# Altium PCB bridge6.PcbDoc
Units mm, origin at the board's own origin, x right, y up, seen from the top; angles counter-clockwise.
Board outline 14.8 x 31.5 mm, 4 copper layers (Top Layer, Internal Plane 1, Internal Plane 2, Bottom Layer), stack 0.758 mm thick; 13 components, 64 nets, 33 pads, 60 vias.
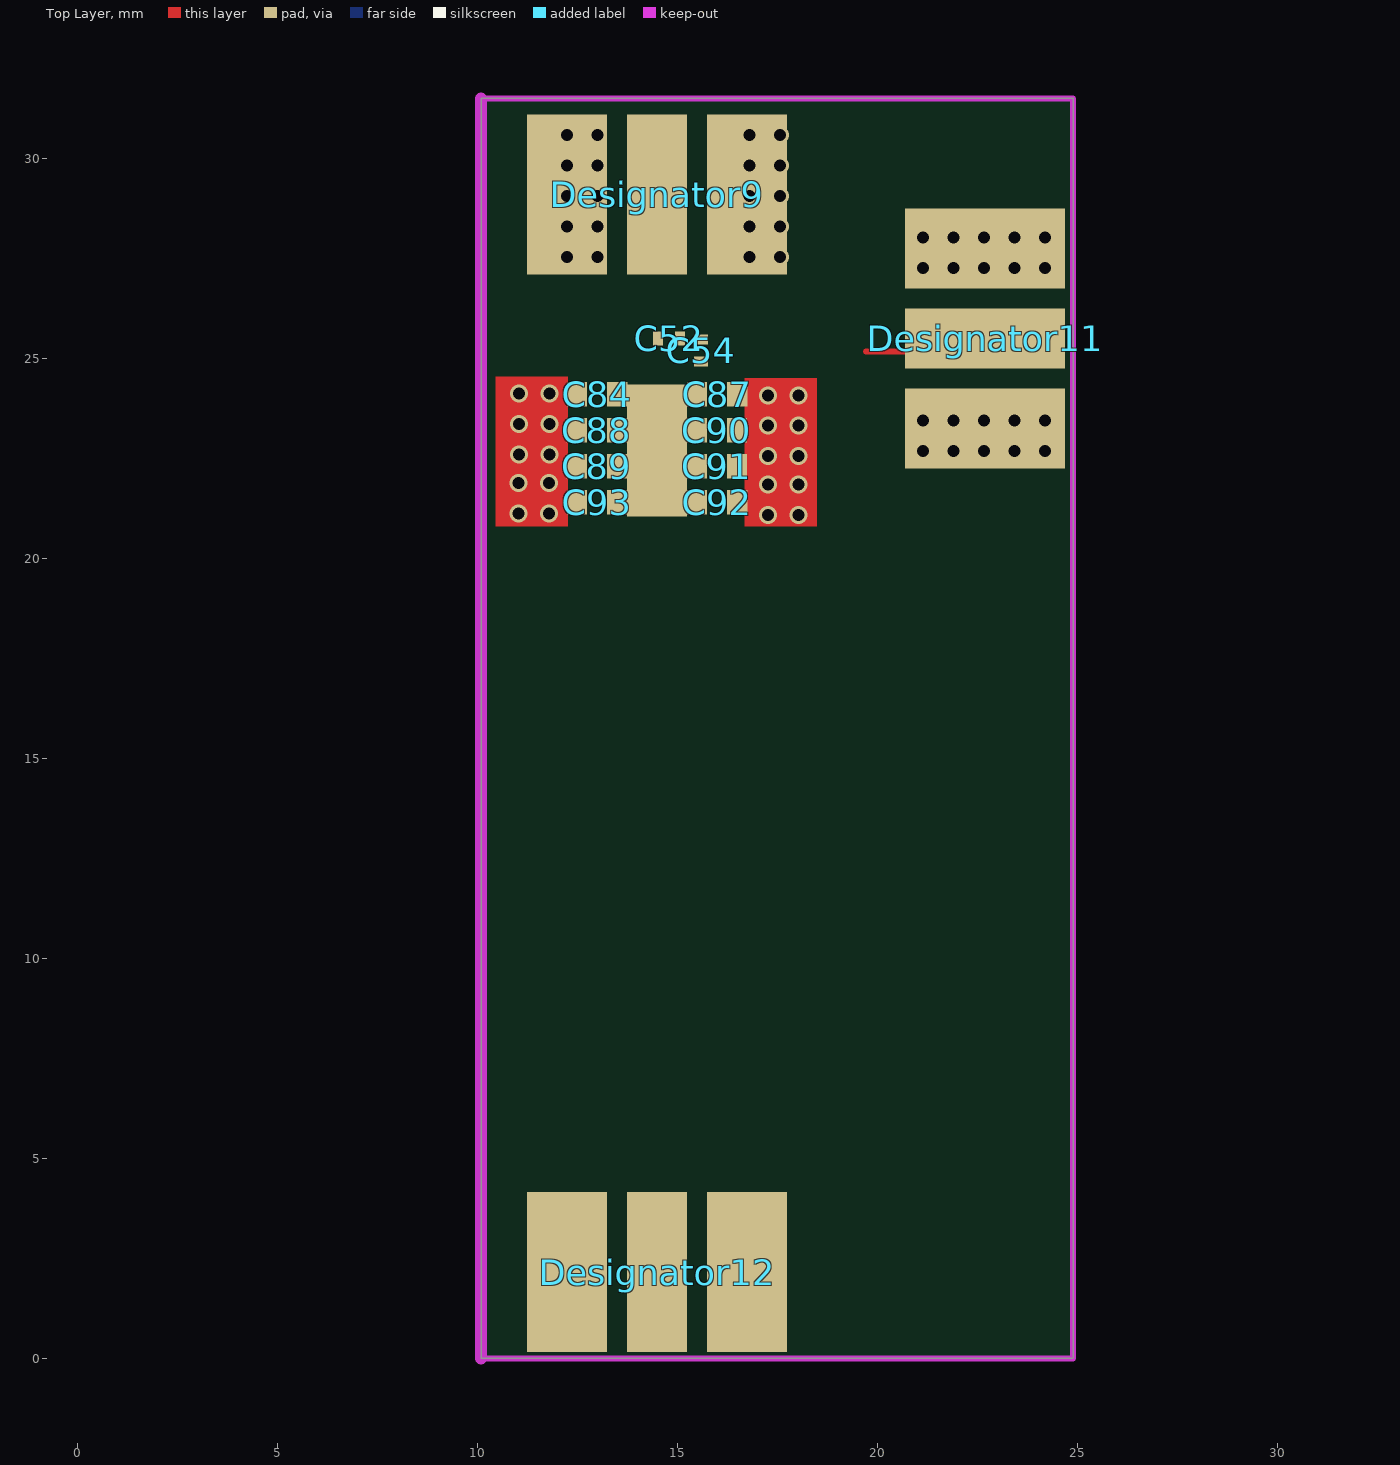
[diagram p0: Top Layer view]
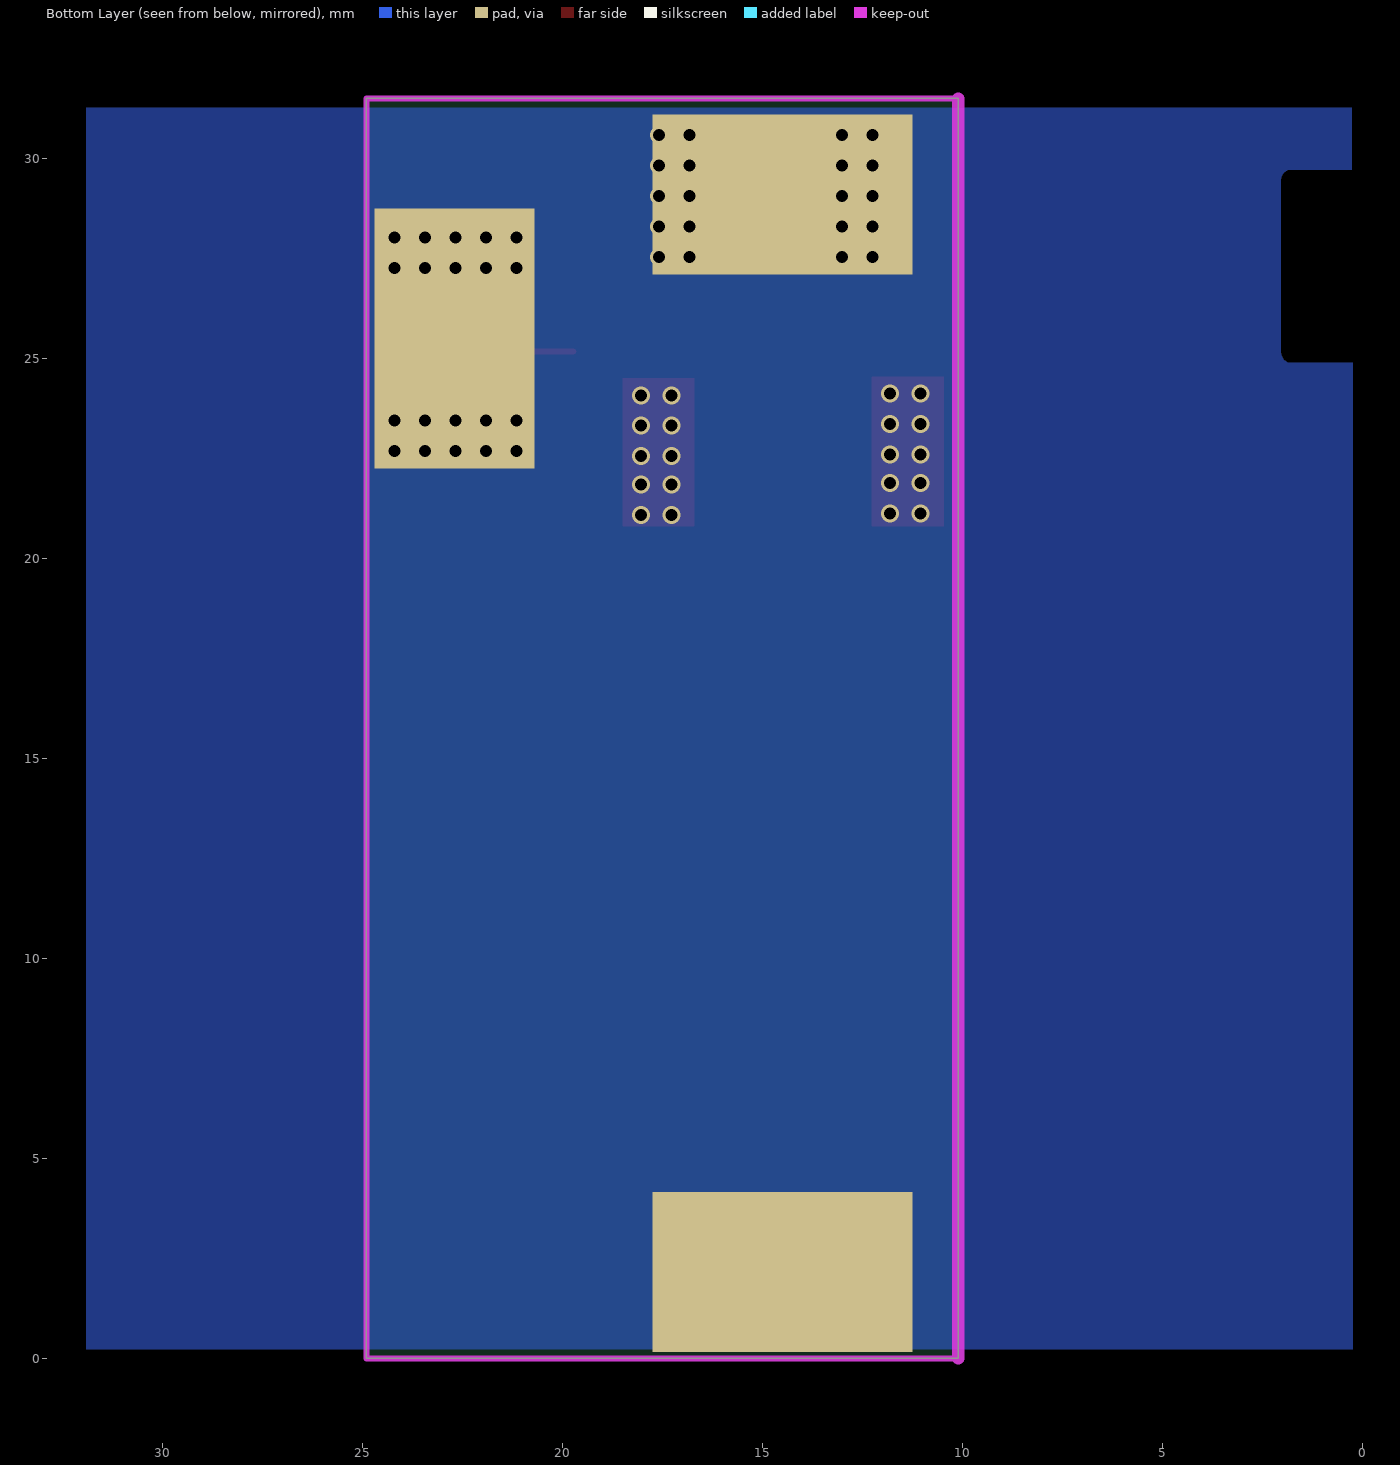
[diagram p1: Bottom Layer view, seen from below]
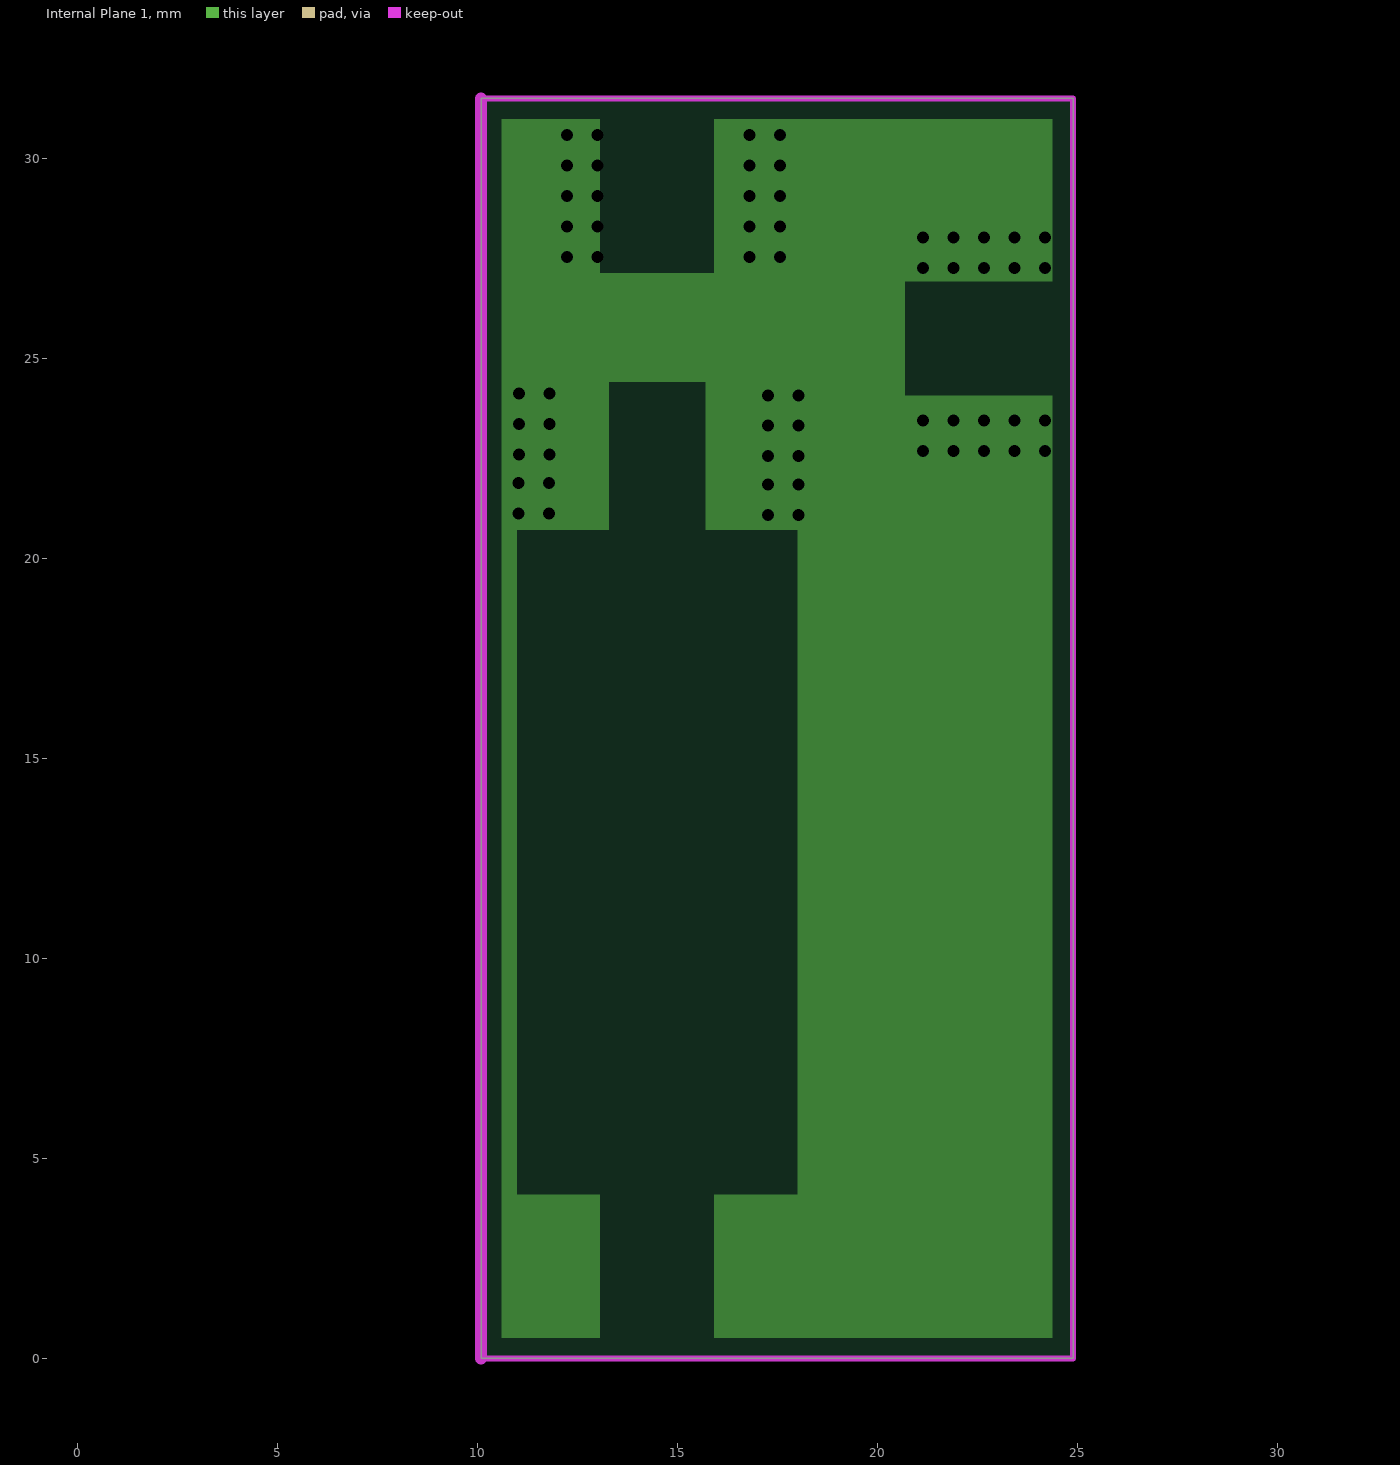
[diagram p2: Internal Plane 1, clearances drawn from the general rule]
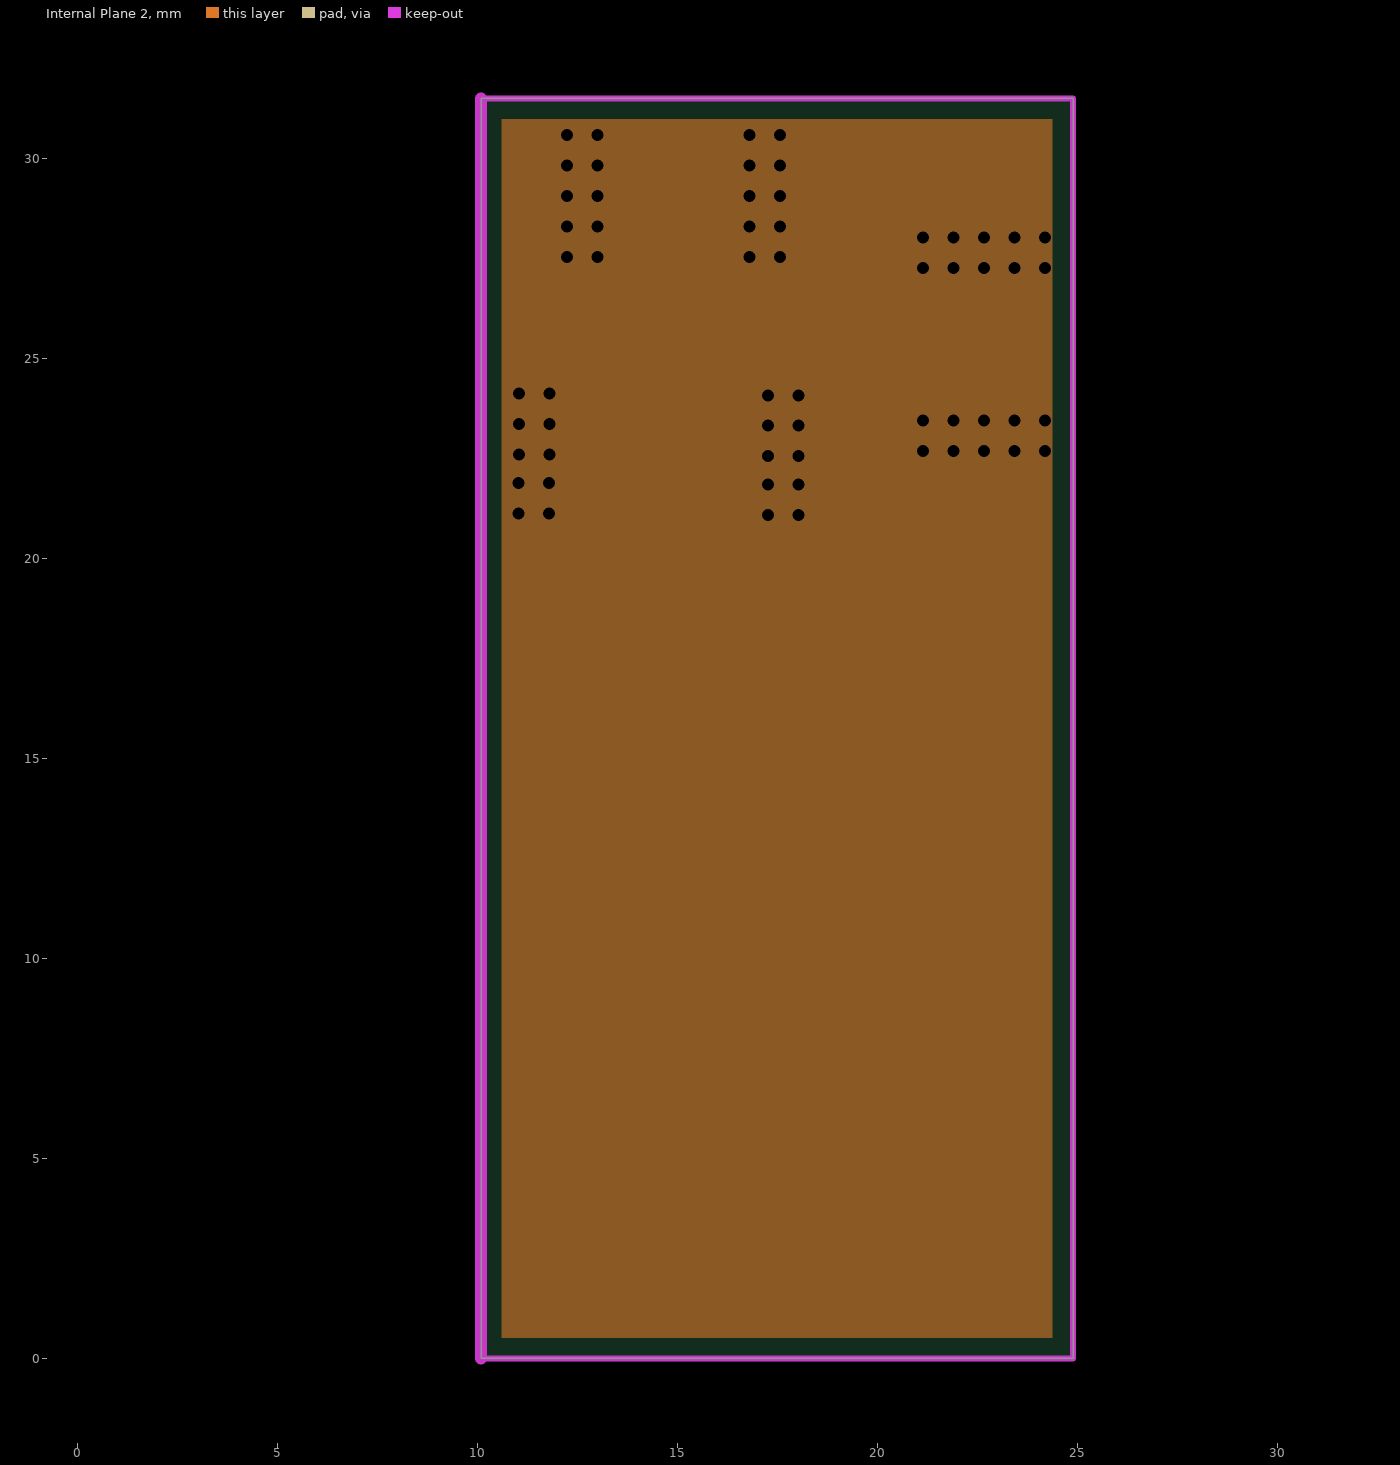
[diagram p3: Internal Plane 2, clearances drawn from the general rule]

## Layer stack, top to bottom
Top Solder: solder mask 0.0102, Solder Resist, Dk 3.8
Top Layer: signal copper 0.0356
Dielectric 1: prepreg 0.1803, Dk 4.6
Internal Plane 1: plane copper 0.036, net GND
Dielectric 3: core 0.254, Dk 4.6
Internal Plane 2: plane copper 0.036, net GND
Dielectric 4: prepreg 0.1803, Dk 4.6
Bottom Layer: signal copper 0.0356
Bottom Solder: solder mask 0.0102, Solder Resist, Dk 3.8

## Board outline
10.1,0 10.1,31.497 24.9,31.497 24.9,0

## Design rules (kind name [scope] priority, off if disabled: settings)
Clearance [All] p1: gap=0.152 ignorepadtopadclearanceinfootprint=FALSE except(0: Arc-Hole Track-Hole SMDPad-Hole THPad-Hole Via-Hole Fill-Hole Poly-Hole Region-Hole Text-Hole)
DiffPairsRouting [All] p1: maxlimit=0.254 minlimit=0.254 mostfreqgap=0.254 toplayer_minwidth=0.152 toplayer_maxwidth=0.381 toplayer_prefwidth=0.381 bottomlayer_minwidth=0.152 bottomlayer_maxwidth=0.381 bottomlayer_prefwidth=0.381 maxuncoupledlength=12.7
MinimumSolderMaskSliver [All] p1 off: minsoldermaskwidth=0.254
PlaneClearance [All] p1: clearance=0.254
PlaneConnect [All] p1: planeconnectstyle=Direct reliefexpansion=0.508 reliefentries=4 reliefconductorwidth=0.254 reliefairgap=0.254
PolygonConnect [All] p1: connectstyle=Direct reliefconductorwidth=0.254 reliefentries=4 polygonreliefangle="90 Angle" airgapwidth=0.254
RoomDefinition mixer [InComponentClass('mixer')] p1 off: confinementstyle=ConfineIn formatcopy=TRUE lockcomponents=FALSE outline 50.026,42.539 188.939,42.539 188.939,52.572 50.026,52.572
RoomDefinition power [InComponentClass('power')] p2 off: confinementstyle=ConfineIn formatcopy=TRUE lockcomponents=FALSE outline 49.924,0.706 109.487,0.706 109.487,6.802 49.924,6.802
RoutingVias [All] p1: holewidth=0.305 width=0.508 viastyle="Through Hole" minholewidth=0.3 minwidth=0.5 maxholewidth=0.711 maxwidth=1.27
SilkToBoardRegionClearance [All] p1 off:
SilkToSilkClearance [All] p1 off: silktosilkclearance=0.254
SilkToSolderMaskClearance [IsPad] p1 off: minsilkscreentomaskgap=0.254 clearancetoexposedcopper=TRUE
SolderMaskExpansion [All] p1: expansion=0.102
Width [All] p1: maxlimit=1.524 minlimit=0.152 preferedwidth=0.152
23 further rules are at their usual default settings.

## Classes and differential pairs
component class mixer: R28
differential pair IF2: +IF2_P -IF2_N
differential pair IF1: +IF1_P -IF1_N

## Components (designator, comment, footprint, x,y, rotation, side; value= is the part's Value field where it differs from the comment)
C52 "0.1uF" 0201 14.8,25.5 r0 top (schematic designator C51)
C54 "0.1uF" 0201 15.6,25.2 r90 top (schematic designator C51)
C84 "0.1uF" 0402 13,24.1 r0 top (schematic designator C80)
C87 "0.1uF" 0402 16,24.1 r0 top (schematic designator C80)
C88 "0.1uF" 0402 12.992,23.2 r0 top (schematic designator C80)
C89 "0.1uF" 0402 12.992,22.3 r0 top (schematic designator C80)
C90 "0.1uF" 0402 15.992,23.2 r0 top (schematic designator C80)
C91 "0.1uF" 0402 15.992,22.3 r0 top (schematic designator C80)
C92 "0.1uF" 0402 16,21.4 r0 top (schematic designator C80)
C93 "0.1uF" 0402 13,21.4 r0 top (schematic designator C80)
Designator9 "Comment" SMA-1.5mm 14.5,29.1 r0 top
Designator11 "Comment" SMA-1.5mm 22.7,25.5 r90 top
Designator12 "Comment" SMA-1.5mm 14.5,2.155 r0 top

## Footprints (in the part's own frame and the unit in brackets; to place one, negate y for a bottom-side part, rotate by r counter-clockwise, add the part's x,y. Pads: shape width x height; smd on the part's side, far side on the other; paste and mask are expansions set on the pad)
0201 [mm]
  rect 0.25x0.35 smd: 1(-0.275,0) 2(0.275,0)
  body extent -0.3,-0.15 0.3,0.15, height 0.23
0402 [mil] "0402-RES"
  rect 20x24 smd: 1(-19.68,0) 2(20,0)
SMA-1.5mm [mm]
  rect 1.5x4 smd: 1(0,0)
  rect 2x4 smd: GND(-2.25,0) GND(2.25,0)
  rect 6.5x4 smd far side: GND(0,0)
  Top Layer pour cut-out: -1.25,2 1.25,2 1.25,-1.975 -1.25,-1.975
  Internal Plane 1 region: 1.42,-1.962 1.42,2 -1.425,2 -1.425,-1.962

## Part data
C52 C54 C84 C87 C88 C89 C90 C91 C92 C93: library part CAP0402-CAP, "<b>Capacitor</b> / Standard 0603 ceramic capacitor, and 0.1\" leaded capacitor.", PARTNO=CC0402ZRY5V7BB104

## Free pads (board coordinates)
  rect 1.5x3.3 smd: 6(14.5,22.7)

## Via types
v1: diameter 0.45, hole 0.3, Top Layer to Bottom Layer, 60 vias

## Nets (pads, with @x,y where several pads share a name; then routed paths per layer and width w, separated by ;. In a path a pad name is that pad's centre, name@x,y a point inside that pad or via, vN(x,y) a via of type N, cw(c..) or ccw(c..) an arc to the next point about the centre after c; other vN are vias at no path point)
5V: 
5V-MIXER: Designator11.1 | length 2.7
  Top Layer w0.152: 19.724,25.175 Designator11.1@22.391,25.175
5VA: 
5VB: 
6V: 
-3.3V: 
DETO: 
GND: C84.1 C87.2 C88.1 C89.1 C90.2 C91.2 C92.2 C93.1 Designator9.GND@12.25,29.1 Designator9.GND@16.75,29.1 Designator11.GND@22.7,23.25 Designator11.GND@22.7,27.75
  other v1: 17.272,21.082 18.034,21.082 11.042,21.12 11.804,21.12 17.272,21.844 18.034,21.844 11.042,21.882 11.804,21.882 17.276,22.554 18.038,22.554 11.046,22.592 11.808,22.592 21.146,22.686 21.908,22.686 22.67,22.686 23.432,22.686 24.194,22.686 17.276,23.316 18.038,23.316 11.046,23.354 11.808,23.354 21.146,23.448 21.908,23.448 22.67,23.448 23.432,23.448 24.194,23.448 17.276,24.078 18.038,24.078 11.046,24.116 11.808,24.116 21.146,27.258 21.908,27.258 22.67,27.258 23.432,27.258 24.194,27.258 12.243,27.534 13.005,27.534 16.815,27.534 17.577,27.534 21.146,28.02 21.908,28.02 22.67,28.02 23.432,28.02 24.194,28.02 12.243,28.296 13.005,28.296 16.815,28.296 17.577,28.296 12.243,29.058 13.005,29.058 16.815,29.058 17.577,29.058 12.243,29.82 13.005,29.82 16.815,29.82 17.577,29.82 12.243,30.582 13.005,30.582 16.815,30.582 17.577,30.582
IF1_N: 
IF1_P: 
IF2_N: 
IF2_P: 
IF3+: 
IF3-: 
NetAnt1_1: Designator9.1 | length 0
  Top Layer w0.33: Designator9.1@14.834,29.058 Designator9.1@14.859,29.083
NetAnt2_1: 
NetC1_1: 
NetC1_2: 
NetC2_1: 
NetC4_1: 
NetC7_2: 
NetC11_2: 
NetC15_2: 
NetC18_2: 
NetC24_2: 
NetC28_1: 
NetC28_2: 
NetC29_1: 
NetC30_1: 
NetC30_2: 
NetC31_1: 
NetC31_2: 
NetC43_2: 
NetC44_1: 
NetC44_2: 
NetC45_2: 
NetC46_1: 
NetC46_2: 
NetC47_2: 
NetC48_2: 
NetC49_1: 
NetC49_2: 
NetC50_1: 
NetC50_2: 
NetC51_2: 
NetC53_2: 
NetC57_1: 
NetC57_2: 
NetC58_1: 
NetC58_2: 
NetC59_1: 
NetC59_2: 
NetC60_1: 
NetC60_2: 
NetC64_2: 
NetC66_2: 
NetR2_1: 
NetR4_1: 
NetR5_1: 
NetR10_1: 
NetR15_1: 
NetR24_1: 
VSET: 
VSYS: 
pads on no net: C52.1 C52.2 C54.1 C54.2 C84.2 C87.1 C88.2 C89.2 C90.1 C91.1 C92.1 C93.2 Designator9.GND@14.5,29.1 Designator11.GND@22.7,25.5 Designator12.1 Designator12.GND

## Polygon pours and split planes (outlines as drawn)
GND on Bottom Layer "GND_L04_P000" (solid, remove dead copper, pour order 0): 0.013,31.497 43.658,31.497 43.658,-0.939 41.753,-2.844 -0.767,-2.844
GND on Internal Plane 1 (split plane): 24.39,26.92 20.7,26.92 20.7,24.075 24.39,24.075 24.39,0.51 15.92,0.51 15.92,4.1 18,4.1 18,20.7 15.7,20.7 15.7,24.4 13.3,24.4 13.3,20.7 11,20.7 11,4.1 13.075,4.1 13.075,0.51 10.61,0.51 10.61,30.987 13.075,30.987 13.075,27.138 15.92,27.138 15.92,30.987 24.39,30.987
GND on Internal Plane 2 (split plane): 24.39,0.51 10.61,0.51 10.61,30.987 24.39,30.987

## Keep-outs
Keep-Out Layer:
  the board outline again, w0.305

## Other copper
Top Layer:
  rectangle net GND: 10.462,20.8 12.27,24.548
  rectangle net GND: 16.692,20.8 18.5,24.51
Internal Plane 1 (plane layer: these items are gaps in the copper):
  rectangle: 11,4.1 18,20.7
  rectangle: 13.3,20.7 15.7,24.4